# Altium PCB Sensor_LoRa_Flower_Watchdog.PCBDOC (part 1 of 2)
Units mil, origin at the board's own origin, x right, y up, seen from the top; angles counter-clockwise.
Board outline 1299.21 x 7913.39 mil, 2 copper layers (Top, Bot), stack 63.824 mil thick; 64 components, 53 nets, 204 pads, 152 vias.
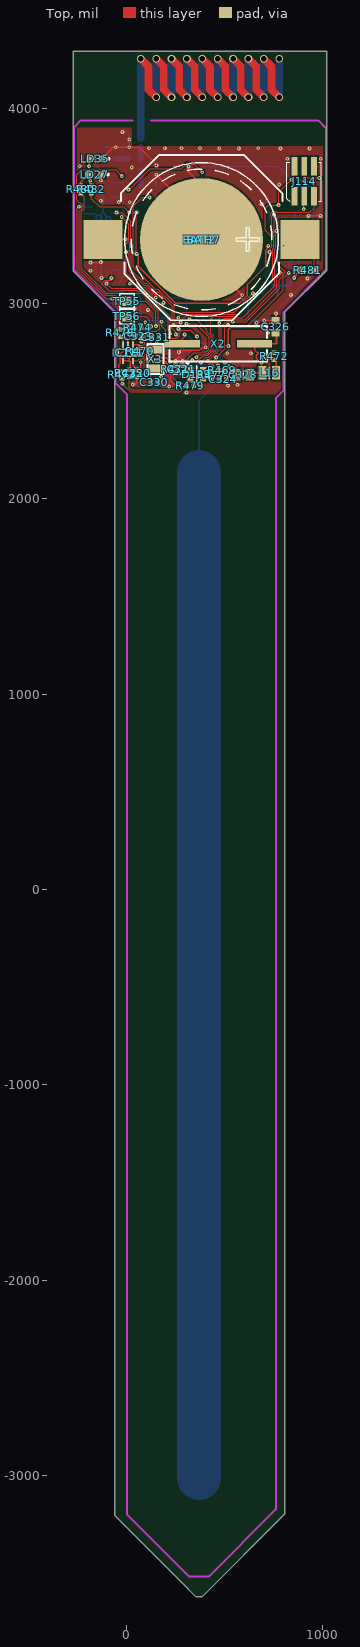
[diagram p0: Top view]
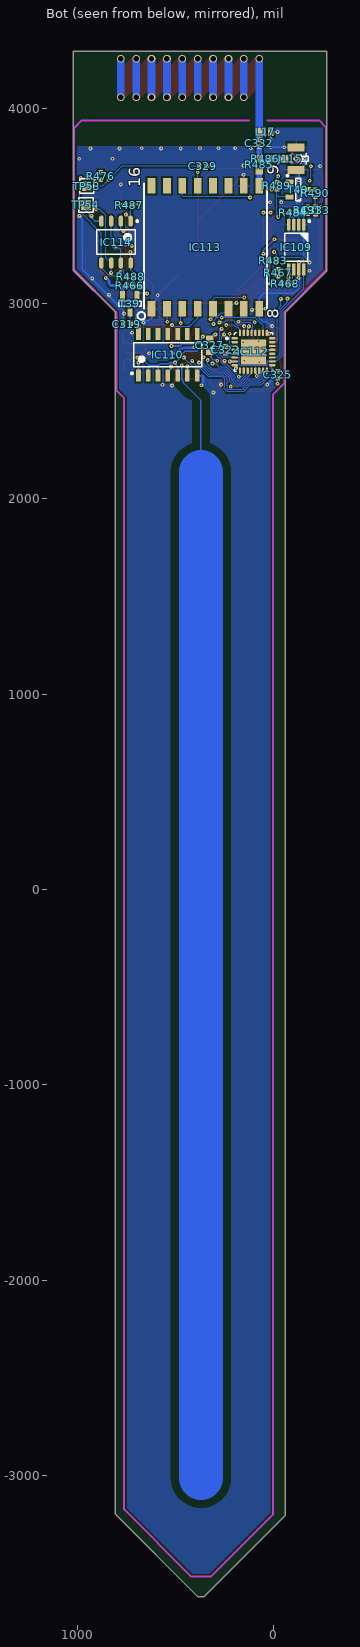
[diagram p1: Bot view, seen from below]
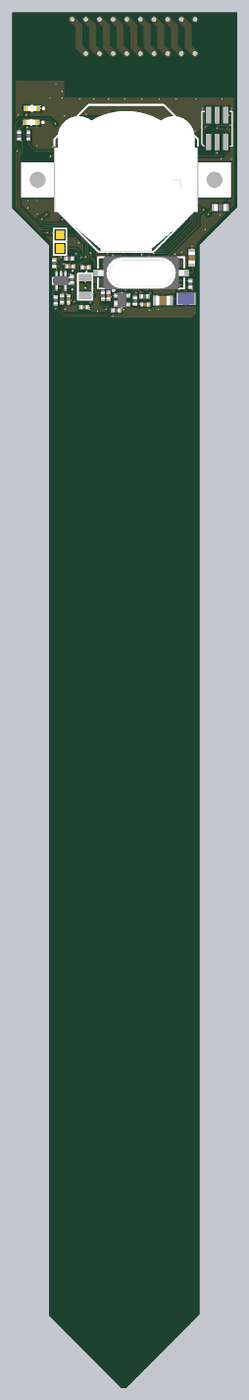
[diagram p2: 3D render of the assembled board from above, using the file's embedded part models]
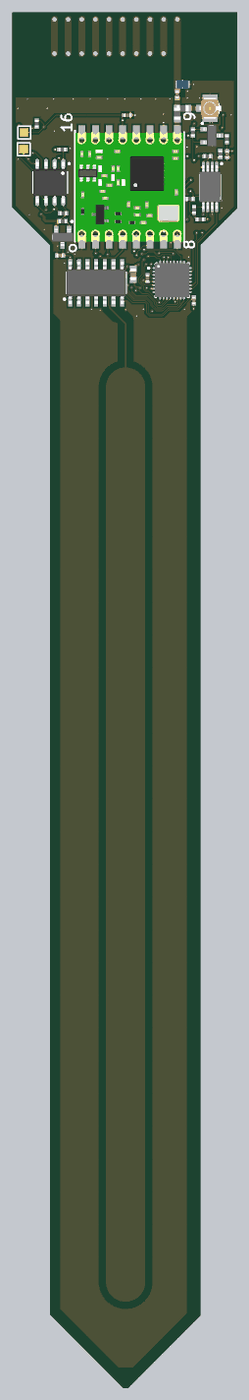
[diagram p3: 3D render of the assembled board from below, using the file's embedded part models]

## Layer stack, top to bottom
TopSolder: solder mask 0.4, Solder Resist, Dk 3.5
Top: signal copper 1.4
Dielectric1: core 61.0236, FR-4, Dk 4.8
Bot: signal copper 1.4
BottomSolder: solder mask 0.4, Solder Resist, Dk 3.5

## Board outline
-62.15,-3172.39 -62.15,2952.76 -275.59,3166.2 -275.59,4291.34 1023.62,4291.34 1023.62,3169.6 806.77,2952.76 806.77,-3172.39 806.77,-3199.13 383.86,-3622.05 354.33,-3622.05 275.59,-3543.31 -62.15,-3205.57

## Design rules (kind name [scope] priority, off if disabled: settings)
Clearance Clearance_1 [InNet('GND') vs InNet('PROBE')] p1: gap=42.13 ignorepadtopadclearanceinfootprint=FALSE
Clearance Clearance_DIFF [(InDifferentialPairClass('All Differential Pairs'))] p2: gap=5 ignorepadtopadclearanceinfootprint=FALSE except(0: Arc-Hole Track-Hole SMDPad-Hole THPad-Hole Via-Hole Fill-Hole Poly-Hole Region-Hole Text-Hole; 10: Arc-Poly Track-Poly SMDPad-Poly THPad-Poly Via-Poly Fill-Poly Poly-Poly Poly-Region Poly-Text)
Clearance [All] p3: gap=5 ignorepadtopadclearanceinfootprint=FALSE except(0: Arc-Hole Track-Hole SMDPad-Hole THPad-Hole Via-Hole Fill-Hole Poly-Hole Region-Hole Text-Hole; 10: Arc-Poly Track-Poly SMDPad-Poly Via-Poly; 15: THPad-Poly Fill-Poly Poly-Poly)
ComponentClearance [All] p1: gap=5 collisioncheckmode=3 verticalgap=10 showdistances=FALSE
DiffPairsRouting [All] p1: maxlimit=10 minlimit=5 mostfreqgap=5 toplayer_minwidth=5 toplayer_maxwidth=15 toplayer_prefwidth=10 bottomlayer_minwidth=5 bottomlayer_maxwidth=15 bottomlayer_prefwidth=10 maxuncoupledlength=500
FabricationTestPointUsage TestPointUsage [All] p1: valid=0 allowmultiple=FALSE
FabricationTestpoint Testpoint [All] p1: side=3 testpointundercomponent=TRUE minsize=40 maxsize=100 preferedsize=60 minholesize=20 maxholesize=40 preferedholesize=32 testpointgrid=1 allowsidetop=TRUE allowsidebottom=TRUE usegrid=TRUE gridtolerance=0.01
HoleSize [All] p1: absolutevalues=TRUE maxlimit=150 minlimit=1 maxpercent=80.000 minpercent=20.000
HoleToHoleClearance [All] p1: gap=1 allowstackedmicrovias=TRUE
MinimumSolderMaskSliver [All] p1: minsoldermaskwidth=0
PlaneClearance [All] p1: clearance=10
PlaneConnect [All] p1: planeconnectstyle=Direct reliefexpansion=20 reliefentries=4 reliefconductorwidth=10 reliefairgap=10
PolygonConnect PolygonConnect_pad [(InPadClass('All Pads'))] p1: connectstyle=Relief reliefconductorwidth=10 reliefentries=4 polygonreliefangle="90 Angle" airgapwidth=10
PolygonConnect [All] p2: connectstyle=Direct reliefconductorwidth=10 reliefentries=4 polygonreliefangle="45 Angle" airgapwidth=10
RoomDefinition Sensor_LoRa_Flower_Watchdog [InComponentClass('Sensor_LoRa_Flower_Watchdog')] p1 off: confinementstyle=ConfineIn formatcopy=TRUE lockcomponents=FALSE outline 5.91,133.86 415.35,133.86 415.35,1511.81 5.91,1511.81
RoutingVias [All] p1: holewidth=7.87 width=19.68 viastyle="Through Hole" minholewidth=7.87 minwidth=19.68 maxholewidth=28 maxwidth=50
SilkToSilkClearance [All] p1: silktosilkclearance=0
SilkToSolderMaskClearance SilkscreenOverComponentPads [IsPad] p1: minsilkscreentomaskgap=0 clearancetoexposedcopper=TRUE
SolderMaskExpansion [All] p1: expansion=2
Width [All] p1: maxlimit=236.22 minlimit=5 preferedwidth=5
19 further rules are at their usual default settings.

## Components (designator, comment, footprint, x,y, rotation, side; value= is the part's Value field where it differs from the comment)
BAT2 "3V" BAT_VARTA_CR2032 381.89,3326.77 r0 top locked
BATH7 "3002" "KEYSTONE 3002" 381.89,3326.77 r0 top locked
C319 "100nF" CAPC1005X55N 748.03,2893.7 r180 bottom
C320 "100nF" CAPC1005X55N 50.2,2641.73 r270 top
C321 "1nF" CAPC1005X55N 281.5,2662.4 r270 top
C322 "100nF" CAPC1005X55N 242.89,2761.81 r90 bottom
C323 "1nF" CAPC1005X55N 59.06,2831.34 r180 top
C324 "22pF" CAPC1005X55N 492.13,2611.22 r180 top
C325 "1nF" CAPC1005X55N -24.61,2634.99 r270 bottom
C326 "39pF" CAPC1608X87N 760.83,2880.91 r270 top locked
C327 "39pF" CAPC1608X87N 324.8,2785.43 r90 bottom
C328 "82pF" CAPC2012X90N 594.49,2634.84 r0 top
C329 "100nF" CAPC1005X55N 359.33,3700.79 r0 bottom
C330 "22pF" CAPC1005X55N 140.05,2595.71 r180 top
C331 "22pF" CAPC1005X55N 147.64,2825.98 r180 top
C332 "1pF" CAPC1005X55N 70.87,3818.9 r90 bottom
C333 "1nF" CAPC1005X55N -217.52,3475.39 r90 bottom
D139 "BAS40-07W" INFINEON-PG-SOT343-4 357.28,2636.81 r0 top
IC109 "M24256-BRDW6" SOP65P640X120-8N -118.11,3287.4 r270 bottom
IC110 "SN74LVC04AD" SOIC127P600X175-14N 538.78,2736.22 r90 bottom locked
IC111 "MCP6L01T-E/LT" SC70 31.5,2788.39 r180 top locked
IC112 "ATMEGA328PB-MU" QFN50P500X500X100-33N-S325 100.39,2751.97 r180 bottom locked
IC113 "RFM95W-868S2" RFM95W 346.46,3287.4 r90 bottom locked
IC114 "W25X40CLSNIG" SOIC127P600X135-8N 803.74,3313.98 r270 bottom locked
J114 "ZL322-2X3P or PLHTD6S-TR-CV" ZL322-2X3P 907.68,3624.02 r0 top locked
J115 "U.FL" HIROSE_U.FL-R-SMT-1(10) -118.11,3740.16 r270 bottom
L16 "47nH" IND_COILCRAFT_0805CS 728.35,2644.09 r0 top locked
L17 "12nH" IND_COILCRAFT_0603HP 39.37,3877.95 r180 bottom
LD27 "Green" LED_KINGBRIGHT_KPH-1608CGCK -165.35,3659.59 r180 top
LD35 "Green" LED_KINGBRIGHT_KPH-1608CGCK -161.42,3740.16 r180 top
R466 "100k" RESC1005X40N 732.68,3090.55 r0 bottom
R467 "10k" RESC1005X40N -26.57,3156.69 r90 bottom
R468 "10k" RESC1005X40N -62.2,3101.38 r180 bottom
R469 "120" RESC1005X40N 488.39,2657.48 r180 top
R470 "47k" RESC1005X40N 68.9,2754.74 r270 top
R471 "10k" RESC1005X40N 248.03,2662.4 r270 top
R472 "1M" RESC1005X40N 752.95,2729.33 r90 top
R473 "10k" RESC1005X40N -24.6,2634.99 r270 top
R474 "10k" RESC1005X40N 54.13,2875.98 r180 top
R475 "10k" RESC1005X40N 11.81,2642.72 r90 top
R476 "10k" RESC1005X40N 881.89,3651.57 r270 bottom
R477 "120" RESC1005X40N 433.07,2631.89 r270 top
R478 "47k" RESC1005X40N -33.92,2848.43 r270 top
R479 "10k" RESC1005X40N 324.56,2577.6 r180 top
R480 "10k" RESC1005X40N -236.22,3582.87 r90 top
R481 "0" RESC1608X55N 926.18,3169.29 r0 top
R482 "10k" RESC1005X40N -182.09,3582.87 r90 top
R483 "10k" RESC1005X40N -1.57,3218.5 r0 bottom
R484 "100k" RESC1005X40N -103.35,3464.57 r0 bottom
R485 "Undefined" RESC1608X55N 70.87,3708.66 r90 bottom
R486 "0" RESC1608X55N 39.37,3740.16 r0 bottom
R487 "10k" RESC1005X40N 735.04,3502.95 r0 bottom
R488 "10k" RESC1005X40N 729.65,3136.03 r0 bottom
R489 "100k" RESC1005X40N -19.68,3601.38 r270 bottom
R490 "560k" RESC1005X40N -216.54,3562.99 r270 bottom
R491 "100k" RESC1005X40N -177.17,3477.36 r90 bottom
T39 "BSS84LT1G" SOT95P240X110-3N 732.68,2998.03 r270 bottom
T40 "BSS84LT1G" SOT95P240X110-3N -128.94,3582.68 r180 bottom
TP53 "Test Point" TPS127 953.74,3600.39 r180 bottom
TP54 "Test Point" TPS127 957.68,3503.94 r180 bottom
TP55 "Test Point" TPS127 0,3011.81 r0 top
TP56 "Test Point" TPS127 0,2933.07 r0 top
X2 "QSDG27M000-TXC or MCRSD27000F183000RR" HC-49SM 468.54,2793.31 r0 top locked
X3 "FC-135 32.768KHZ ±20PPM,12.5PF" XTAL_FC135 145.67,2716 r90 top

## Footprints (in the part's own frame and the unit in brackets; to place one, negate y for a bottom-side part, rotate by r counter-clockwise, add the part's x,y. Pads: shape width x height; smd on the part's side, far side on the other; paste and mask are expansions set on the pad)
BAT_VARTA_CR2032 [mil] "CR2032, 20mm Diameter x 32mm  Height Lithium Coin Cells"
  silkscreen extent -394,-394 394,394, body extent -394,-394 394,394, height 126
CAPC1005X55N [mm] "Chip Capacitor, Body 1.0x0.55mm, IPC Medium Density"
  rect 0.62x0.62 smd: 1(-0.45,0) 2(0.45,0)
  body extent -0.52,-0.27 0.53,0.28, height 0.55
CAPC1608X87N [mm] "Chip Capacitor, Body 1.6x0.8mm IPC Medium Density"
  rect 0.95x1 smd: 1(-0.8,0) 2(0.8,0)
  body extent -0.87,-0.47 0.88,0.48, height 0.87
CAPC2012X90N [mm] "Chip Capacitor, Body 2.0x1.25mm, IPC Medium Density"
  rect 1.1x1.45 smd: 1(-0.9,0) 2(0.9,0)
  silkscreen extent 0,-0.58 0,0.58, body extent -1.05,-0.67 1.05,0.68, height 0.9
HC-49SM [mil]
  rect 180x39.37 smd: 1(185,0) 2(-185,0)
  silkscreen extent -250,-90 249,90, body extent -250,-94 250,94, height 63
HIROSE_U.FL-R-SMT-1(10) [mm] "Up to 6GHz Ultra Small Surface Mount Male Coaxial Connectors U.FL Series"
  rect 1x1.05 smd: 1(0,-1.525)
  rect 1.05x2.2 smd: 2(-1.475,0) 2(1.475,0)
  Top keep-out lines w0.1: 0.6,0 ccw(c0,0) -0.6,0 -0.6,-0.65 0.6,-0.65 0.6,0
  silkscreen extent -0.7,-0.69 0.7,1.55, body extent -1.5,-1.55 1.5,1.55, height 1.25
IND_COILCRAFT_0603HP [mm] "Chip Inductor, Body Width 1.09mm Body Lenght 1.75mm Height 0.94mm"
  rect 0.69x1.02 smd: 1(-0.7,0) 2(0.7,0)
  silkscreen extent 0,-0.55 0,0.55, body extent -0.87,-0.54 0.88,0.55, height 0.93
IND_COILCRAFT_0805CS [mm] "SMD Inductor  Body Width 1.73mm Body Lenght 2.29mm Height 1.52mm, 0805CS Series"
  rect 1.02x1.78 smd: 1(-0.89,0) 2(0.89,0)
  silkscreen extent 0,-0.75 0,0.75, body extent -1.14,-0.86 1.14,0.86, height 1.52
INFINEON-PG-SOT343-4 [mm] "INFINEON PG-SOT343-4, SOT343, 1.30mm Pitch; 4 Pin,1.25mm W X 2.00mm L X 1.10mm H body, IPC Medium Density"
  rect 0.8x0.6 smd: 1(-0.8,0.65) 3(0.8,-0.65) 4(0.8,0.65)
  rect 0.8x0.9 smd: 2(-0.8,-0.5)
  silkscreen extent -1.32,-1.1 0,1.52, body extent -1.05,-1.1 1.05,1.1, height 1.1
"KEYSTONE 3002" [mm] "KEYSTONE 3002 CR2032 BATTERY HOLDER"
  rect 5.1x5.1 smd: 1a(12.8,0) 1b(-12.8,0)
  round 16 smd paste-15: 2(0,0)
  silkscreen extent -10.5,-10.5 10.5,11, body extent -15.38,-10.51 15.38,9.36, height 3.95
LED_KINGBRIGHT_KPH-1608CGCK [mm] "SMT Green LED, Case 0603, Body L 1.6 x W 0.8mm H 0.65mm"
  rect 0.8x0.8 smd: 1(-0.825,0) 2(0.825,0)
  silkscreen extent -1.83,-0.4 0.08,0.4, body extent -0.8,-0.4 0.8,0.4, height 0.65
QFN50P500X500X100-33N-S325 [mm] "QFN, (MO-220-VHHD-2) 0.50mm pitch,square; 8 pin X 8 pin, 5mm X 5mm X 1.00mm H body (w/thermal tab 3.25 X 3.25mm),  IPC Medium Density"
  oval 0.85x0.3 smd: 1(-2.45,1.75) 2(-2.45,1.25) 3(-2.45,0.75) 4(-2.45,0.25) 5(-2.45,-0.25) 6(-2.45,-0.75) 7(-2.45,-1.25) 8(-2.45,-1.75) 17(2.45,-1.75) 18(2.45,-1.25) 19(2.45,-0.75) 20(2.45,-0.25) 21(2.45,0.25) 22(2.45,0.75) 23(2.45,1.25) 24(2.45,1.75)
  oval 0.3x0.85 smd: 9(-1.75,-2.45) 10(-1.25,-2.45) 11(-0.75,-2.45) 12(-0.25,-2.45) 13(0.25,-2.45) 14(0.75,-2.45) 15(1.25,-2.45) 16(1.75,-2.45) 25(1.75,2.45) 26(1.25,2.45) 27(0.75,2.45) 28(0.25,2.45) 29(-0.25,2.45) 30(-0.75,2.45) 31(-1.25,2.45) 32(-1.75,2.45)
  rect 3.25x3.25 smd: 33(0,0)
  silkscreen extent -3.58,-2.5 2.5,2.5, body extent -2.5,-2.5 2.5,2.5, height 1
RESC1005X40N [mm] "Chip Resistor, EIA 0402, Metric 1005, Body 1.0x0.5mm, IPC Medium Density"
  rect 0.58x0.62 smd: 1(-0.47,0) 2(0.47,0)
  body extent -0.52,-0.27 0.53,0.28, height 0.4
RESC1608X55N [mm] "Chip Resistor, EIA 0603, Metric 1608, Body 1.6x0.8mm, IPC Medium Density"
  rect 0.9x1 smd: 1(-0.8,0) 2(0.8,0)
  body extent -0.87,-0.47 0.88,0.48, height 0.55
RFM95W [mm] "RFM95W"
  rect 2x1 smd: 1(-8,7) 2(-8,5) 3(-8,3) 4(-8,1) 5(-8,-1) 6(-8,-3) 7(-8,-5) 8(-8,-7) 9(8,-7) 10(8,-5) 11(8,-3) 12(8,-1) 13(8,1) 14(8,3) 15(8,5) 16(8,7)
  silkscreen extent -9.42,-8 8.25,8.83, body extent -8,-7.95 8,7.95, height 2.29
SC70 [mm]
  rect 0.3x0.8 smd: 1(0,0) 2(0.65,0) 3(1.3,0) 4(1.3,2.1) 5(0,2.1)
  silkscreen extent -0.5,0.6 1.9,1.5, body extent -0.46,-0.18 1.74,2.22, height 1.1
SOIC127P600X135-8N [mm] "SOIC, 8-Leads, Body 4.90x3.90mm, Pitch 1.27mm, IPC Medium Density"
  oval 1.45x0.6 smd: 1(-2.725,1.905) 2(-2.725,0.635) 3(-2.725,-0.635) 4(-2.725,-1.905) 5(2.725,-1.905) 6(2.725,-0.635) 7(2.725,0.635) 8(2.725,1.905)
  silkscreen extent -2.85,-2.5 1.6,2.88, body extent -3,-2.5 3,2.5, height 1.35
SOIC127P600X175-14N [mm] "SOIC 14, Pitch 1.27mm - Body 4x8.75mm, IPC Medium Density"
  rect 1.55x0.6 smd: 1(-2.7,3.81) 2(-2.7,2.54) 3(-2.7,1.27) 4(-2.7,0) 5(-2.7,-1.27) 6(-2.7,-2.54) 7(-2.7,-3.81) 8(2.7,-3.81) 9(2.7,-2.54) 10(2.7,-1.27) 11(2.7,0) 12(2.7,1.27) 13(2.7,2.54) 14(2.7,3.81)
  silkscreen extent -2.52,-4.4 1.55,4.79, body extent -3.1,-4.37 3.1,4.38, height 1.75
SOP65P640X120-8N [mm] "SOP, 0.65mm pitch; 8 pin, 4.40mm W X 3.00mm L X 1.20mm H body, IPC Medium Density"
  rect 1.5x0.45 smd: 1(-2.9,0.975) 2(-2.9,0.325) 3(-2.9,-0.325) 4(-2.9,-0.975) 5(2.9,-0.975) 6(2.9,-0.325) 7(2.9,0.325) 8(2.9,0.975)
  silkscreen extent -3.52,-1.5 1.83,1.82, body extent -3.2,-1.55 3.2,1.55, height 1.2
SOT95P240X110-3N [mm] "SOT23 3-Leads, Pitch 0.95mm, Body 1.3x2.9mm, IPC Medium Density"
  rect 1.05x0.65 smd: 1(-1.15,0.95) 2(-1.15,-0.95) 3(1.15,0)
  silkscreen extent -2.42,-1.45 0.3,1.48, body extent -1.25,-1.5 1.25,1.5, height 1.1
TPS127 [mil] "1.27 x  1.27mm SMD Test Point Area"
  rect 50x50 smd paste-50: 1(0,0)
  silkscreen extent -37,-37 37,37
XTAL_FC135 [mm]
  rect 1x1.8 smd: 1(-1.25,0) 2(1.2,0)
  silkscreen extent -1.95,-1.05 1.9,1.05, body extent -1.63,-0.77 1.63,0.77, height 0.8
ZL322-2X3P [mm] "SMT 1.27 mm dual goldpin"
  rect 0.76x2.4 smd: 1(-1.27,-1.95) 2(-1.27,1.95) 3(0,-1.95) 4(0,1.95) 5(1.27,-1.95) 6(1.27,1.95)
  silkscreen extent -2.25,-2.58 2.2,2.5, body extent -2.05,-2.15 2.03,2.15, height 4.5

## Part data
BAT2: library part BAT_VARTA_CR2032, "Battery for use only with Socket Holder", Manufacturer=VARTA, Manufacturer Part Number=6032101501, Power=230mAh, Author="CERN DEM JLC", ComponentHeight=3.2mm, Component Type=Standard, CreateDate=20/10/2009, Family=Battery, HelpURL=\\cern.ch\dfs\Applications\Altium\Datasheets\BAT_VARTA_CR2032.pdf, LatestRevisionDate=20/10/2009, Mounted=Yes, PackageDescription="CR2032, 20mm Diameter x 3.2mm  Height Lithium Coin Cells", Part Description="20x3.2mm Lithium Coin Cells Type CR2032", Part Number=BAT_VARTA_CR2032, Pin Count=0, PressFit=No, Sense=No, SMD=No, Socket=Yes
BATH7: "Battery Holder Keystone 3002", Manufacturer=KEYSTONE, Part Number=BATH_KEYSTONE_3000, Author=GK, ComponentHeight=3.17mm, Component Type=Standard, CreateDate=17/04/2012, Family=Battery, HelpURL=\\cern.ch\dfs\Applications\Altium\Datasheets\BATH_KEYSTONE_3000.pdf, LatestRevisionDate=07/06/2017, Manufacturer Part Number=3002, Mounted=Yes, PackageDescription="KEYSTONE 3002 CR2032 BATTERY HOLDER", Part Description="KEYSTONE 3002 CR2032 BATTERY HOLDER", Pin Count=3, PressFit=No, Sense=No, SMD=Yes, Socket=No
C319 C320 C322 C329: library part CC0402_100NF_16V_10%_X5R, "Non-polarised capacitor", Case=0402, Manufacturer=GENERIC, Manufacturer1 ComponentHeight=0.55mm, Manufacturer1 Example=MURATA, Manufacturer1 Part Number=GRM155R61C104KA88D, Tolerance=±10%, Voltage=16V, Author="CERN DEM JLC", Component Type=Standard, CreateDate=10.12.2013, HelpURL=\\cern.ch\dfs\Applications\Altium\Datasheets\CC0402_X5R_MURATA_GRM.pdf, LatestRevisionDate=10.12.2013, Manufacturer Part Number=CC0402_100NF_16V_10%_X5R, Mounted=Yes, Part Description="SMD Multilayer Chip Ceramic Capacitor", Part Number=CC0402_100NF_16V_10%_X5R, Pin Count=2, Sense=No, SMD=Yes, Socket=No, Status=None, TC=X5R
C321 C323 C325 C333: library part CC0402_1NF_50V_10%_X7R, "Non-polarised capacitor", Case=0402, Manufacturer=GENERIC, Manufacturer1 ComponentHeight=0.55mm, Manufacturer1 Example=PHYCOMP, Manufacturer1 Part Number=223858715623, Tolerance=±10%, Voltage=50V, Author="CERN DEM JLC", Component Type=Standard, CreateDate=03/12/2007, HelpURL=\\cern.ch\dfs\Applications\Altium\Datasheets\CC0402_X7R_PHYCOMP.pdf, LatestRevisionDate=03/12/2007, Manufacturer Part Number=CC0402_1NF_50V_10%_X7R, Mounted=Yes, Part Description="SMD Multilayer Chip Ceramic Capacitor", Part Number=CC0402_1NF_50V_10%_X7R, Pin Count=2, Sense=No, SMD=Yes, Socket=No, Status="Not Recommended", TC=X7R
C324 C330 C331: library part CC0402_22PF_50V_5%_C0G, "Non-polarised capacitor", Case=0402, Manufacturer=GENERIC, Manufacturer1 ComponentHeight=0.55mm, Manufacturer1 Example=KEMET, Manufacturer1 Part Number=C0402C220J5GACTU, Tolerance=±5%, Voltage=50V, Author="CERN DEM JLC", Component Type=Standard, CreateDate=03/12/2007, HelpURL="\\cern.ch\dfs\Applications\Altium\Datasheets\CC0805_C0G_KEMET_(Commercial Grade).pdf", LatestRevisionDate=03/12/2007, Manufacturer Part Number=CC0402_22PF_50V_5%_C0G, Mounted=Yes, Part Description="SMD Multilayer Chip Ceramic Capacitor", Part Number=CC0402_22PF_50V_5%_C0G, Pin Count=2, Sense=No, SMD=Yes, Socket=No, Status=Preferred, TC=C0G/NP0
C326 C327: library part CC0603_39PF_50V_5%_NP0, "Non-polarised capacitor", Case=0603, Manufacturer=GENERIC, Manufacturer1 ComponentHeight=0.87mm, Manufacturer1 Example=PHYCOMP, Manufacturer1 Part Number=223886715399, Tolerance=±5%, Voltage=50V, Author="CERN DEM JLC", Component Type=Standard, CreateDate=03/12/2007, HelpURL=\\cern.ch\dfs\Applications\Altium\Datasheets\CC0603_NP0_PHYCOMP.pdf, LatestRevisionDate=03/12/2007, Manufacturer Part Number=CC0603_39PF_50V_5%_NP0, Mounted=Yes, Part Description="SMD Multilayer Chip Ceramic Capacitor", Part Number=CC0603_39PF_50V_5%_NP0, Pin Count=2, Sense=No, SMD=Yes, Socket=No, Status=Preferred, TC=C0G/NP0
C328: library part CC0805_82PF_100V_1%_NP0_AVX_08051A820FAT2A, "Non-polarised capacitor", Case=0805, Manufacturer=AVX, Manufacturer Part Number=08051A820FAT2A, Tolerance=±1%, Voltage=100V, Author="CERN DEM WB", ComponentHeight=0.9mm, Component Type=Standard, CreateDate=26/07/2016, HelpURL=\\cern.ch\dfs\Applications\Altium\Datasheets\CC0805_C0G_AVX.pdf, LatestRevisionDate=26/07/2016, Mounted=Yes, Part Description="SMD Multilayer Chip Ceramic Capacitor", Part Number=CC0805_82PF_100V_1%_NP0_AVX_08051A820FAT2A, Pin Count=2, Sense=No, SMD=Yes, Socket=No, Status="Not Recommended", TC=NP0
C332: library part CC0402_1PF_50V_0.25PF_C0G, "Non-polarised capacitor", Case=0402, Manufacturer=GENERIC, Manufacturer1 ComponentHeight=0.55mm, Manufacturer1 Example=KEMET, Manufacturer1 Part Number=C0402C109C5GACTU, Tolerance=±0.25pF, Voltage=50V, Author="CERN DEM JLC", Component Type=Standard, CreateDate=03/12/2007, HelpURL="\\cern.ch\dfs\Applications\Altium\Datasheets\CC0805_C0G_KEMET_(Commercial Grade).pdf", LatestRevisionDate=22/04/2015, Manufacturer Part Number=CC0402_1PF_50V_0.25PF_C0G, Mounted=Yes, Part Description="SMD Multilayer Chip Ceramic Capacitor", Part Number=CC0402_1PF_50V_0.25PF_C0G, Pin Count=2, Sense=No, SMD=Yes, Socket=No, Status=Preferred, TC=C0G/NP0
D139: "Anti-Parallel Pair Schottky Diode", Case=SOT343, Manufacturer=INFINEON, Part Number=BAT15099E6327HTSA1, Power=120mA, Voltage=4V, Author=GK, Bonding=No, ComponentHeight=1.1mm, Component Type=Standard, CreateDate=28/03/2018, Device=BAS40-07W, HelpURL=\\cern.ch\dfs\Applications\Altium\Datasheets\BAT15099E6327HTSA1.pdf, LatestRevisionDate=28/03/2018, Manufacturer Part Number=BAS40-07W, Mounted=Yes, PackageDescription="INFINEON PG-SOT343-4, SOT343, 1.30mm Pitch; 4 Pin,1.25mm W X 2.00mm L X 1.10mm H body, IPC Medium Density", Part Description="Anti-Parallel Pair Schottky Diode", Pin Count=4, PressFit=No, Sense=No, SMD=Yes, Socket=No
IC109: "256-Kbit Serial I²C Bus EEPROM", Case=TSSOP8, Manufacturer="ST MICROELECTRONICS", Part Number=M24256-BRDW6P, Author="CERN DEM MR", Bonding=No, ComponentHeight=1.2mm, Component Type=Standard, CreateDate=17.03.2016, Device=M24256-BRDW6, HelpURL=\\cern.ch\dfs\Applications\Altium\Datasheets\M24256-BRDW6P.pdf, LatestRevisionDate=17.03.2016, Manufacturer Part Number=M24256-BRDW6, Mounted=Yes, PackageDescription="SOP, 0.65mm pitch; 8 pin, 4.40mm W X 3.00mm L X 1.20mm H body, IPC Medium Density", Part Description="256-Kbit Serial I²C Bus EEPROM", Pin Count=8, PressFit=No, Sense=No, SMD=Yes, Socket=No
IC110: "Hex Inverter", Case=SOIC14, Manufacturer="TEXAS INSTRUMENTS", Author="CERN DEM JLC", Bonding=No, ComponentHeight=1.75mm, Component Type=Standard, CreateDate=21/06/2011, Device=SN74LVC04AD, HelpURL=\\cern.ch\dfs\Applications\Altium\Datasheets\SN74LVC04AD.pdf, LatestRevisionDate=21/06/2011, Manufacturer Part Number=SN74LVC04AD, Mounted=Yes, PackageDescription="SOIC 14, Pitch 1.27mm - Body 4x8.75mm, IPC Medium Density", Part Description="Hex Inverters", Part Number=SN74LVC04AD, Pin Count=12, PressFit=No, Sense=No, SMD=Yes, Socket=No
IC111: library part OA_MCP6001_SC-70, "1 MHz, Low-Power Op Amp"
IC112: "8-bit AVR 20MHz Microcontroller With 32K Bytes In-System  Programmable  Flash", Case=QFN32, Manufacturer=ATMEL, Author=GK, Bonding=No, ComponentHeight=1mm, Component Type=Standard, CreateDate=2011-02-08, Device=ATMEGA328PB-MU, HelpURL=\\cern.ch\dfs\Applications\Altium\Datasheets\ATMEGA328P-MU.pdf, LatestRevisionDate=2014-07-02, Manufacturer Part Number=ATMEGA328PB-MU, Mounted=Yes, PackageDescription="QFN, (MO-220-VHHD-2) 0.50mm pitch,square; 8 pin X 8 pin, 5mm X 5mm X 1.00mm H body (w/thermal tab 3.25 X 3.25mm),  IPC Medium Density", Part Description="8-bit AVR Microcontroller, 32KB Flash, 1KB EEPROM, 2KB SRAM, 32-pin MLF, Industrial Grade (-40°C to 85°C)", Part Number=ATMEGA328PB-MU, Pin Count=33, PressFit=No, Sense=No, SMD=Yes, Socket=No
IC113: "Low Power LoRa Transceiver Module", Manufacturer="HOPE MICROELECTRONICS", Author=GK, Bonding=No, ComponentHeight=1.52mm, Component Type=Standard, CreateDate=11.08.2016, Device=RFM95W-868S2, HelpURL=\\cern.ch\dfs\Applications\Altium\Datasheets\ERA-4XSM+.pdf, LatestRevisionDate=11.08.2016, Manufacturer Part Number=RFM95W-868S2, Mounted=Yes, PackageDescription="castellated module", Part Description="DC-3GHz Monolithic Amplifier", Part Number=RFM95W-868S2, Pin Count=16, PressFit=No, Sense=No, SMD=Yes, Socket=No
IC114: "4M-bit Serial Flash Memory with uniform 4KB sectors and Dual SPI and QPI", Case=SOIC8, Manufacturer=WINBOND, Author=GK, Bonding=No, ComponentHeight=2.16mm, Component Type=Standard, CreateDate=26/01/2018, Device=W25X40CLSNIG, HelpURL=\\cern.ch\dfs\Applications\Altium\Datasheets\W25Q128FVSIG.pdf, LatestRevisionDate=26/01/2018, Manufacturer Part Number=W25X40CLSNIG, Mounted=Yes, PackageDescription="SOIC, 8-Leads, Body 4.90x3.90mm, Pitch 1.27mm, IPC Medium Density", Part Description="4M-bit Serial Flash Memory with uniform 4KB sectors and Dual SPI", Part Number=W25X40CLSNIG, Pin Count=8, PressFit=No, Sense=No, SMD=Yes, Socket=No
J114: library part "CON_2x3 1.27 SMT Male", "1.27 mm dual row goldpin (Maritex)"
J115: library part HIROSE_U.FL-R-SMT-1(10), Manufacturer="HIROSE (HRS)", Manufacturer Part Number=U.FL-R-SMT-1(10), Author="CERN DEM JLC", ComponentHeight=1.25mm, Component Type=Standard, CreateDate=24/03/2010, Family=U.FL, HelpURL=\\cern.ch\dfs\Applications\Altium\Datasheets\HIROSE_U.FL-R-SMT-1(10).pdf, LatestRevisionDate=24/03/2010, Mounted=Yes, Part Description="Up to 6GHz Ultra Small Surface Mount Male Coaxial Connectors U.FL Series", Part Number=HIROSE_U.FL-R-SMT-1(10), Pin Count=2, PressFit=No, Sense=No, SMD=Yes, Socket=No, Status=None
L16: library part IND_47NH_2%_COILCRAFT_0805CS, "Inductor With Core", Case=0805, Manufacturer=COILCRAFT, Manufacturer Part Number=0805CS-470XGLC, Power=500mA, Resistance=0.31R, Tolerance=±2%, Author="CERN DEM JLC", ComponentHeight=1.52mm, Component Type=Standard, CreateDate=19/08/2013, HelpURL=\\cern.ch\dfs\Applications\Altium\Datasheets\IND_COILCRAFT_0805CS.pdf, LatestRevisionDate=20/08/2013, Mounted=Yes, Part Description="SMT Chip Inductor", Part Number=IND_47NH_2%_COILCRAFT_0805CS, Pin Count=2, Sense=No, SMD=Yes, Socket=No, Status=None
L17: "Inductor", Case=0603, Manufacturer=Murata, Manufacturer Part Number=LQW18AN12NG00D, Part Number=IND0603_12NH_2%_LQW18AN12NG00D, Power=0.6A, Resistance=0.13R, Tolerance=±2%, Author=GK, ComponentHeight=0.94mm, Component Type=Standard, CreateDate=09/02/2017, HelpURL=\\cern.ch\dfs\Applications\Altium\Datasheets\IND0603_COILCRAFT_0603HP.pdf, LatestRevisionDate=09/02/2017, Mounted=Yes, Part Description="Ceramic Chip Inductor", Pin Count=2, Sense=No, SMD=Yes, Socket=No, Status=None
LD27 LD35: library part LED_KINGBRIGHT_KPH-1608CGCK, "LED Green 1C 2A", Manufacturer=KINGBRIGHT, Manufacturer Part Number=KPH-1608CGCK, Author="CERN DEM JLC", Bonding=No, Color=Green, ComponentHeight=0.65mm, Component Type=Standard, CreateDate=03.07.2017, HelpURL=\\cern.ch\dfs\Applications\Altium\Datasheets\LED_KINGBRIGHT_KPH-1608CGCK.pdf, LatestRevisionDate=03.07.2017, Mounted=Yes, PackageDescription="SMT Green LED, Case 0603, Body L 1.6 x W 0.8mm H 0.65mm", Part Description="SMD Green LED, Case 1.6mmX0.8mm(0603), 0.65mm Thickness", Part Number=LED_KINGBRIGHT_KPH-1608CGCK, Pin Count=2, PressFit=No, Sense=No, SMD=Yes, Socket=No
R466 R484 R489 R491: library part R0402_100K_1%_0.0625W_100PPM, "Resistor - 1%", Case=0402, Manufacturer=GENERIC, Manufacturer1 ComponentHeight=0.4mm, Manufacturer1 Example="YAGEO PHYCOMP", Manufacturer1 Part Number=232270671004L, Power=0.0625W, Tolerance=±1%, Author="CERN DEM JLC", Component Type=Standard, CreateDate=03/12/2007, HelpURL=\\cern.ch\dfs\Applications\Altium\Datasheets\R0402_Phycomp_RC0402.pdf, LatestRevisionDate=17/10/2012, Manufacturer Part Number=R0402_100K_1%_0.0625W_100PPM, Mounted=Yes, Part Description="General Purpose Thick Film Chip Resistor", Part Number=R0402_100K_1%_0.0625W_100PPM, Pin Count=2, PressFit=No, Sense=No, SMD=Yes, Socket=No, Status="Not Recommended", TC=±100ppm/°C
R467 R468 R471 R473 R474 R475 R476 R479 R480 R482 R483 R487 R488: library part R0402_10K_1%_0.0625W_100PPM, "Resistor - 1%", Case=0402, Manufacturer=GENERIC, Manufacturer1 ComponentHeight=0.4mm, Manufacturer1 Example="YAGEO PHYCOMP", Manufacturer1 Part Number=232270671003L, Power=0.0625W, Tolerance=±1%, Author="CERN DEM JLC", Component Type=Standard, CreateDate=03.12.2007, HelpURL=\\cern.ch\dfs\Applications\Altium\Datasheets\R0402_Phycomp_RC0402.pdf, LatestRevisionDate=17.10.2012, Manufacturer Part Number=R0402_10K_1%_0.0625W_100PPM, Mounted=Yes, Part Description="General Purpose Thick Film Chip Resistor", Part Number=R0402_10K_1%_0.0625W_100PPM, Pin Count=2, PressFit=No, Sense=No, SMD=Yes, Socket=No, Status="Not Recommended", TC=±100ppm/°C
R469 R477: library part R0402_120R_1%_0.0625W_100PPM, "Resistor - 1%", Case=0402, Manufacturer=GENERIC, Manufacturer1 ComponentHeight=0.4mm, Manufacturer1 Example="YAGEO PHYCOMP", Manufacturer1 Part Number=232270671201L, Power=0.0625W, Tolerance=±1%, Author="CERN DEM JLC", Component Type=Standard, CreateDate=03/12/2007, HelpURL=\\cern.ch\dfs\Applications\Altium\Datasheets\R0402_Phycomp_RC0402.pdf, LatestRevisionDate=17/10/2012, Manufacturer Part Number=R0402_120R_1%_0.0625W_100PPM, Mounted=Yes, Part Description="General Purpose Thick Film Chip Resistor", Part Number=R0402_120R_1%_0.0625W_100PPM, Pin Count=2, PressFit=No, Sense=No, SMD=Yes, Socket=No, Status="Not Recommended", TC=±100ppm/°C
R470 R478: library part R0402_47K_1%_0.0625W_100PPM, "Resistor - 1%", Case=0402, Manufacturer=GENERIC, Manufacturer1 ComponentHeight=0.4mm, Manufacturer1 Example="YAGEO PHYCOMP", Manufacturer1 Part Number=232270675103L, Power=0.0625W, Tolerance=±1%, Author="CERN DEM JLC", Component Type=Standard, CreateDate=03/12/2007, HelpURL=\\cern.ch\dfs\Applications\Altium\Datasheets\R0402_Phycomp_RC0402.pdf, LatestRevisionDate=17/10/2012, Manufacturer Part Number=R0402_47K_1%_0.0625W_100PPM, Mounted=Yes, Part Description="General Purpose Thick Film Chip Resistor", Part Number=R0402_47K_1%_0.0625W_100PPM, Pin Count=2, PressFit=No, Sense=No, SMD=Yes, Socket=No, Status="Not Recommended", TC=±100ppm/°C
R472: library part R0402_1M_1%_0.0625W_100PPM, "Resistor - 1%", Case=0402, Manufacturer=GENERIC, Manufacturer1 ComponentHeight=0.4mm, Manufacturer1 Example="YAGEO PHYCOMP", Manufacturer1 Part Number=232270671005L, Power=0.0625W, Tolerance=±1%, Author="CERN DEM JLC", Component Type=Standard, CreateDate=03/12/2007, HelpURL=\\cern.ch\dfs\Applications\Altium\Datasheets\R0402_Phycomp_RC0402.pdf, LatestRevisionDate=17/10/2012, Manufacturer Part Number=R0402_1M_1%_0.0625W_100PPM, Mounted=Yes, Part Description="General Purpose Thick Film Chip Resistor", Part Number=R0402_1M_1%_0.0625W_100PPM, Pin Count=2, PressFit=No, Sense=No, SMD=Yes, Socket=No, Status="Not Recommended", TC=±100ppm/°C
R481 R486: library part R0603_0R_JUMPER, "Resistor", Case=0603, Manufacturer=GENERIC, Manufacturer1 ComponentHeight=0.55mm, Manufacturer1 Example="NIC COMPONENT", Manufacturer1 Part Number=NRC06Z0, Author="CERN DEM JLC", Component Type=Standard, CreateDate=03/12/2007, HelpURL=\\cern.ch\dfs\Applications\Altium\Datasheets\R0603_NIC_NRC.pdf, LatestRevisionDate=13/03/2008, Manufacturer Part Number=R0603_0R_JUMPER, Mounted=Yes, Part Description="1A (0.05R Max DC Resistance) Zero Ohm Jumper", Part Number=R0603_0R_JUMPER, Pin Count=2, PressFit=No, Sense=No, SMD=Yes, Socket=No, Status=Preferred
R485: library part R0603_NO-VALUE, "Resistor", Case=0603, Author="CERN DEM JLC", Component Type=Standard, CreateDate=03/12/2007, HelpURL=Undefined, LatestRevisionDate=13/03/2008, Manufacturer=Undefined, Manufacturer1 ComponentHeight=Undefined, Manufacturer1 Example=Undefined, Manufacturer1 Part Number=Undefined, Manufacturer Part Number=R0603_NO-VALUE, Mounted=No, Part Description="Reserved Footprint For a 0603 (1608) Chip Resistor", Part Number=R0603_NO-VALUE, Pin Count=2, PressFit=No, Sense=No, SMD=Yes, Socket=No, Status=None
R490: library part R0402_560K_1%_0.0625W_100PPM, "Resistor - 1%", Case=0402, Manufacturer=GENERIC, Manufacturer1 ComponentHeight=0.4mm, Manufacturer1 Example="YAGEO PHYCOMP", Manufacturer1 Part Number=232270675604L, Power=0.0625W, Tolerance=±1%, Author="CERN DEM JLC", Component Type=Standard, CreateDate=03/12/2007, HelpURL=\\cern.ch\dfs\Applications\Altium\Datasheets\R0402_Phycomp_RC0402.pdf, LatestRevisionDate=17/10/2012, Manufacturer Part Number=R0402_560K_1%_0.0625W_100PPM, Mounted=Yes, Part Description="General Purpose Thick Film Chip Resistor", Part Number=R0402_560K_1%_0.0625W_100PPM, Pin Count=2, PressFit=No, Sense=No, SMD=Yes, Socket=No, Status="Not Recommended", TC=±100ppm/°C
T39 T40: "P-CHANNEL MOSFET WITH DIODE", Case=SOT23-3, Manufacturer="ON SEMICONDUCTOR", Author="CERN DEM JLC", Bonding=No, ComponentHeight=1.1mm, Component Type=Standard, CreateDate=29.03.2012, Device=BSS84LT1G, HelpURL=\\cern.ch\dfs\Applications\Altium\Datasheets\BSS84LT1G.pdf, LatestRevisionDate=29.03.2012, Manufacturer Part Number=BSS84LT1G, Mounted=Yes, PackageDescription="SOT23 3-Leads, Pitch 0.95mm - Body 1.4x3mm, IPC Medium Density", Part Description="50V 130mA Single P-Channel Power MOSFET", Part Number=BSS84LT1G, Pin Count=3, PressFit=No, Sense=No, SMD=Yes, Socket=No
TP53 TP54 TP55 TP56: library part SMD_PAD_1.27X1.27MM, Author="CERN DEM JLC", ComponentHeight=0mm, Component Type="Standard (No BOM)", CreateDate=12.01.2008, Family="Test Point", HelpURL=Undefined, LatestRevisionDate=12.01.2008, Mounted=No, PackageDescription="1.27mm x 1.27mm PCB Copper Area (SMD Test Point)", Part Description="1.27mm x 1.27mm PCB Copper Area (SMD Test Point)", Part Number=SMD_PAD_1.27X1.27MM, Pin Count=1, Sense=No, SMD=Yes, Socket=No, Status=None
X2: library part X_CRYSTAL_HC49_SMT_27M, "Crystal oscillator", Supplier Part Number 1=56P2844, Supplier 1=Newark
X3: library part X_CRYSTAL_32k_FC-135, "32kHz SMT crystal (EPSON)"

## Via types
v1: diameter 19.68, hole 7.87, Top to Bot, tented both sides, 133 vias
v2: diameter 39.37, hole 27.56, Top to Bot, tented both sides, 19 vias

## Nets (pads, with @x,y where several pads share a name; then routed paths per layer and width w, separated by ;. In a path a pad name is that pad's centre, name@x,y a point inside that pad or via, vN(x,y) a via of type N, cw(c..) or ccw(c..) an arc to the next point about the centre after c; other vN are vias at no path point)
ANT: C332.2 L17.1 | length 4242.2
  Top w39.37: v2(70.87,4251.97) 110.24,4212.6 110.24,4094.49 v2(149.61,4055.12) ; v2(149.61,4251.97) 188.98,4212.6 188.98,4094.49 v2(228.35,4055.12) ; v2(228.35,4251.97) 267.72,4212.6 267.72,4094.49 v2(307.09,4055.12) ; v2(307.09,4251.97) 346.46,4212.6 346.46,4094.49 v2(385.83,4055.12) ; v2(385.83,4251.97) 425.2,4212.6 425.2,4094.49 v2(464.57,4055.12) ; v2(464.57,4251.97) 503.94,4212.6 503.94,4094.49 v2(543.31,4055.12) ; v2(543.31,4251.97) 582.68,4212.6 582.68,4094.49 v2(622.05,4055.12) ; v2(622.05,4251.97) 661.42,4212.6 661.42,4094.49 v2(700.79,4055.12) ; v2(700.79,4251.97) 740.16,4212.6 740.16,4094.49 v2(779.53,4055.12)
  Bot w39.37: C332.2@70.87,3846.65 v2(70.87,4251.97) ; v2(149.61,4055.12) v2(149.61,4251.97) ; v2(228.35,4055.12) v2(228.35,4251.97) ; v2(307.09,4055.12) v2(307.09,4251.97) ; v2(385.83,4055.12) v2(385.83,4251.97) ; v2(464.57,4055.12) v2(464.57,4251.97) ; v2(543.31,4055.12) v2(543.31,4251.97) ; v2(622.05,4055.12) v2(622.05,4251.97) ; v2(700.79,4055.12) v2(700.79,4251.97) ; v2(779.53,4055.12) v2(779.53,4251.97)
GND: BATH7.2 C319.1 C320.2 C321.1 C322.1 C323.1 C324.1 C325.1 C326.1 C327.1 C328.1 C329.1 C330.1 C331.1 C333.1 IC109.1 IC109.2 IC109.3 IC109.4 IC109.7 IC110.7 IC111.2 IC112.5 IC112.21 IC112.33 IC113.1 IC113.8 IC113.10 IC114.4 J114.6 J115.2 L17.2 LD27.1 LD35.1 R471.1 R478.1 R479.1 R484.1 R491.1 TP54.1 | length 6152.5
  Top w8: v1(-187.01,3208.69) -135.72,3208.69 v1(-132.87,3211.54) ; v1(-161.42,3740.16) LD35.1 ; v1(-132.87,3629.92) LD27.1 ; -98.43,3740.16 LD35.1 ; v1(4.89,2883.67) 9.37,2879.2 6.16,2875.98 -24.86,2875.98 R478.1 -33.51,2866.93 -14.08,2847.5 -14.08,2846.43 -12.71,2845.07 -12.71,2837.31 -6.75,2831.34 -6.75,2827.63 5.21,2815.67 5.21,2789.08 IC111.2 5.91,2765.75 15.75,2755.91 v1(39.37,2755.91) ; v1@34.44,2588.59 39.52,2583.51 50.2,2594.19 C320.2 52.17,2624.02 71.4,2643.25 71.4,2675.91 70.87,2676.45 v1(70.87,2698.82) ; v1(73.82,2805.14) 76.79,2805.14 78.74,2807.09 C323.1@78.74,2831.69 ; v1(146.65,2707.18) 192.42,2707.18 201.64,2697.96 201.64,2694.96 215.7,2680.91 R471.1 ; v1(150.93,3658.46) BATH7.2@381.89,3427.51 ; v1(150.93,3705.71) 150.93,3710.88 62.6,3799.21 v1(11.81,3799.21) v1(-57.09,3799.21) -69.89,3799.21 LD35.1 ; v1(152.56,2800.2) 157.48,2805.12 C331.1@157.48,2825.79 ; C330.1 179.63,2573.84 v1(216.54,2573.84) ; v1(265.75,2583.68) 244.43,2583.68 224.41,2603.7 224.41,2657.28 R471.1 ; C321.1 285.75,2684.37 v1(285.75,2706.4) 268.72,2723.43 265.75,2723.43 ; v1(314.96,3700.79) 314.96,3673.23 381.89,3606.3 BATH7.2@381.89,3427.51 ; v1(403.55,2775.61) 407.55,2771.61 407.55,2770.67 383.32,2770.67 372.11,2759.46 274.21,2759.46 v1(265.75,2751.01) 265.75,2723.43 ; C324.1@506.89,2615.16 506.89,2588.58 v1(516.73,2578.74) ; C328.1 559.06,2590.55 v1(565.94,2583.66) ; v1(590.55,3041.34) 381.89,3250 BATH7.2 BATH7.2@381.89,3427.51 ; v1(703.15,2911.81) 760.24,2911.81 C326.1 762.8,2914.37 v1(762.8,2947.83) ; v1(930.12,3447.33) v1(990.55,3447.33) ; R471.1 v1(248.03,2705.71) 265.75,2723.43
  Bot w8: C333.1 -178.35,3457.68 R491.1 -164.96,3458.86 -156.5,3450.39 ; v1(-187.01,3208.69) -187.01,3211.61 -156.5,3242.13 IC109.1 -156.5,3450.39 ; v1(-161.42,3740.16) -161.42,3709.65 -133.85,3682.09 -118.11,3682.09 -132.87,3667.32 v1(-132.87,3629.92) -121.85,3618.9 R484.1 ; v1(-132.87,3211.54) v1(-132.87,3211.54) -130.91,3213.58 IC109.7 v1(-130.91,3129.92) -130.91,3075.49 -106.6,3051.18 47.24,3051.18 70.87,3027.55 IC113.8 70.87,2922.01 55.55,2906.7 33.46,2906.7 10.43,2883.67 v1(4.89,2883.67) ; IC109.2 -132.68,3403.35 R484.1@-132.68,3453.74 ; J115.2@-118.11,3798.23 -67.91,3798.23 -66.93,3799.21 v1(-57.09,3799.21) v1(11.81,3799.21) v1(11.81,3838.58) L17.2 v1(-22.78,3877.95) ; IC109.3 -105.31,3448.03 ; IC109.4 -79.72,3432.09 -91,3443.36 -99.99,3443.36 -104.66,3448.03 -105.31,3448.03 ; C325.1 -22.63,2652.71 11.81,2618.26 11.81,2601.4 v1(29.53,2583.68) ; IC112.21 90.55,2761.81 IC112.33 IC112.33@110.24,2742.13 ; IC113.10 149.61,3657.14 v1(150.93,3658.46) ; IC112.5@195.56,2743.42 IC112.5 244.83,2742.13 244.95,2742.25 C322.1@243.11,2744.09 ; C322.1 C322.1@243.11,2744.09 ; v1(265.75,2751.01) 265.75,2749.86 259.99,2744.09 C322.1@243.11,2744.09 ; v1(285.75,2706.4) 290.15,2710.79 307.32,2710.79 317.25,2720.72 317.25,2753.27 317.91,2753.94 C327.1 ; v1(314.96,3700.79) C329.1 ; 356.3,2629.92 355.71,2629.33 355.71,2593.58 359.25,2597.13 359.25,2629.92 IC110.7 ; v1(403.55,2775.61) 409.02,2770.14 468.59,2770.14 485.76,2752.97 ; v1(590.55,3041.34) 590.55,3026.57 622.05,2995.08 IC113.1 622.05,2925.2 635.43,2911.81 v1(703.15,2911.81) ; v1(762.8,2947.83) v1@765.75,2944.88 ; C319.1 v1@765.75,2944.88 ; IC114.4 911.42,3421.26 930.12,3439.96 v1(930.12,3447.33) 957.68,3474.89 TP54.1 ; v1(990.55,3447.33) 976.77,3433.55 976.77,3173.23 765.75,2962.2 v1@765.75,2944.88 ; -156.5,3450.39 -136.02,3450.39 R484.1@-132.68,3453.74 ; R484.1@-132.68,3453.74 R484.1 ; R484.1 -105.31,3448.03
  other v1: 305.12,2544.29 367.07,2580.63 513.42,2744.52 634.84,2744.52 721.85,2849.41 663.39,2900.85 108.27,2966.54 38.35,2972.44 839.47,3043.31 925.2,3127.69 -186.16,3167.22 688.98,3508.86 14.76,3517.26 -41.89,3518.7 -132.87,3525.59 779.53,3609.21 24.61,3695.87 -241.14,3701.77 821.85,3740.16 992,3740.16 472.44,3793.23 572.99,3793.23 785.61,3793.23 935.04,3793.23 113.19,3794.29 194.51,3794.29 279.9,3794.29 374.05,3794.29 672.48,3794.29
"MCU_A0_VBAT MOSFET": IC112.23 R489.1 T40.1 | length 1369.2
  Top w5: v1(-40.3,3022.6) -59.29,3041.6 -111.16,3041.6 -243.88,3174.32 -243.88,3471.78 -228.72,3486.94 -228.72,3501.31 -255.93,3528.51 -255.93,3657.47 -230.56,3682.83 -57.84,3682.83 v1(-26.57,3651.57)
  Bot w5: T40.1 -83.46,3619.88 R489.1 -19.68,3644.68 v1(-26.57,3651.57) ; v1(-40.3,3022.6) -40.3,2986.89 -20.3,2966.89 -20.3,2806.71 -14.76,2801.18 IC112.23
"MCU_A1-RTC VCC": IC112.24
"MCU_A4_I2C SDA": IC112.27
"MCU_A5_I2C SCL": IC112.28
"MCU_A6_VBAT VOLT": C333.2 IC112.19 R490.2 R491.2 | length 1036.4
  Top w5: v1(-246.06,3494.12) -253.88,3486.31 -253.88,3170.18 -107.96,3024.26 v1(-73.82,3024.26)
  Bot w5: v1(-246.06,3494.12) C333.2@-216.54,3494.12 ; C333.2 C333.2@-216.54,3494.09 ; R490.2 C333.2@-216.54,3494.12 ; R491.2 -178.91,3494.12 C333.2@-216.54,3494.12 ; v1(-73.82,3024.26) -73.82,3006.27 -36.26,2968.71 -36.26,2739.92 -18.78,2722.44 IC112.19
"MCU_A7_VIN VOLT": IC112.22
MCU_AREF: IC112.20
"MCU_D2_INT0 RFM69": IC112.32 IC113.14 | length 1321.9
  Top w5: v1(117.13,3542.32) 77.75,3542.32 31.23,3495.8 31.23,3273.67 21.87,3264.3 21.87,3170.03 90.3,3101.6 99.61,3101.6 143.44,3057.77 159.23,3057.77 231.61,2985.38 231.61,2906.18 239.25,2898.54 v1(239.25,2888.78)
  Bot w5: v1(117.13,3542.32) 119.88,3545.08 459.45,3545.08 464.57,3550.2 IC113.14 ; IC112.32 169.29,2868.11 179.86,2878.68 188.49,2878.68 198.59,2888.78 v1(239.25,2888.78)
MCU_D3_INT1-RTC_INT: IC112.1
MCU_D4_BTN1: IC112.2
MCU_D5_BTN2: IC112.9
MCU_D6_LED1: IC112.10 R482.1 | length 1371.9
  Top w5: R482.1 -182.09,3536.22 -139.99,3494.12 -17.29,3494.12 v1(12.2,3464.63) ; v1(49.07,3464.63) 47.24,3462.79 47.24,3275.53 31.87,3260.16 31.87,3186.63 145.67,3072.83 158.3,3072.83 241.61,2989.53 241.61,2910.95 256.6,2895.96 256.6,2870.61 257.86,2869.35 v1(263.78,2869.35)
  Bot w5: v1(12.2,3464.63) v1(49.07,3464.63) ; IC112.10 149.61,2634.3 160.86,2623.05 161.74,2623.94 v1(175.16,2623.94) 175.16,2626.06 237.47,2688.37 255.21,2688.37 265.37,2698.53 265.37,2716 272.04,2722.66 277.49,2722.66 294.09,2739.27 294.09,2765.2 273.6,2785.69 273.6,2860.47 v1@263.78,2870.29
"MCU_D7-RFM69 RST": IC112.11 IC113.6 R484.2 | length 1425.1
  Top w5: v1(-54.13,3464.57) -24.61,3464.57 20.45,3419.51 20.45,3316.43 13.94,3309.91 13.94,3270.51 11.87,3268.45 11.87,3165.18 85.45,3091.6 95.47,3091.6 139.8,3047.27 154.82,3047.27 158.17,3043.92 158.94,3043.92 193.94,3008.92 v1(187.01,3001.99) ; v1(305.12,2895.06) 352.97,2895.06 420.89,2827.14 420.89,2767.75 406.26,2753.12 387.86,2753.12 380.8,2746.06 343.27,2746.06 310.04,2712.83 v1(310.04,2691.95)
  Bot w5: R484.2 v1(-54.13,3464.57) ; IC112.11 129.92,2639.85 164.06,2605.71 181.46,2605.71 192.5,2616.75 192.5,2627.97 237.6,2673.07 274.81,2673.07 280.67,2678.93 280.67,2680.36 289.37,2689.06 307.15,2689.06 v1(310.04,2691.95) ; v1(187.01,3001.99) 196.85,3001.99 226.4,2972.44 IC113.6 252.3,2948.49 268.61,2948.49 279.9,2937.2 279.9,2929.97 284.29,2925.57 290.35,2925.57 301.41,2914.52 301.41,2898.77 v1(305.12,2895.06)
"MCU_D8_FLASH SS": IC112.12 IC114.1 R487.1 | length 1516.6
  Top w5: v1(334.65,2709.29) 337.39,2706.55 363.48,2706.55 383,2726.06 389.09,2726.06 396.14,2733.12 414.55,2733.12 440.89,2759.46 440.89,2835.43 428.15,2848.17 428.15,2918.31 443.31,2933.46 552.66,2933.46 560.01,2926.12 593.44,2926.12 757.66,3090.33 757.66,3275.71 760.77,3278.82 760.77,3351.52 748.41,3363.88 748.41,3378.25 752.95,3382.79 752.95,3454.24 v1(753.44,3454.72)
  Bot w5: IC112.12 110.24,2645.39 159.91,2595.71 185.6,2595.71 202.5,2612.61 202.5,2623.82 241.74,2663.07 310.71,2663.07 334.65,2687.01 v1(334.65,2709.29) ; R487.1 728.74,3490.75 IC114.1@728.74,3430.03 ; IC114.1 IC114.1@728.74,3430.03 ; v1(753.44,3454.72) IC114.1@728.74,3430.03
MCU_D9_LED2: IC112.13 R480.1 | length 1309.6
  Top w5: R480.1 -218.72,3546.87 -218.72,3482.8 -233.88,3467.64 -233.88,3178.46 -107.02,3051.6 78.9,3051.6 99.58,3030.92 99.58,3022.23 159.82,2961.99 159.82,2898.84 165.34,2893.33 165.34,2888.24 166.95,2886.63 166.95,2872.53 150.93,2856.52 125.44,2856.52 106.98,2838.06 106.98,2797.55 100.39,2790.96 100.39,2719.37 88.21,2707.18 88.21,2632.52 v1(83.66,2627.97) v1@88.56,2627.97
  Bot w5: v1(83.66,2627.97) 84.27,2628.58 84.27,2649.23 IC112.13
"MCU_D10_RFM69 SS": IC112.14 IC113.5 R483.2 | length 1294.2
  Top w5: v1(14.76,3100.39) 49.12,3100.39 67.91,3081.6 91.32,3081.6 129.58,3043.34 129.58,3034.66 134.31,3029.93 v1(147.64,3029.93) ; v1(319.88,2918.33) 354.33,2918.33 408.46,2864.2 408.46,2853.71 430.89,2831.28 430.89,2763.61 410.41,2743.12 392,2743.12 384.94,2736.06 368.47,2736.06 v1(356.3,2723.89)
  Bot w5: v1(14.76,3100.39) 16.93,3102.56 R483.2 ; IC112.14 73.35,2653.02 74.27,2653.02 74.27,2643.11 66.32,2635.16 66.32,2620.79 76.48,2610.63 130.85,2610.63 155.77,2585.71 189.74,2585.71 212.5,2608.47 212.5,2619.68 245.89,2653.07 314.85,2653.07 356.3,2694.52 v1(356.3,2723.89) ; v1(147.64,3029.93) 297.36,3029.93 307.09,3020.2 IC113.5 307.09,2931.93 319.88,2919.13 v1(319.88,2918.33)
MCU_D11_SPI_MOSI: IC112.15 IC113.3 IC114.5 J114.4 | length 2017.9
  Top w5: v1(378.94,2696.87) 378.94,2695.79 406.2,2723.05 418.62,2723.05 472.44,2776.88 v1@472.44,2894.38 ; v1(472.44,2898.65) 497.26,2923.46 548.52,2923.46 555.86,2916.12 605.1,2916.12 767.72,3078.74 767.72,3127.21 800.54,3160.04 v1(782.48,3160.04) ; J114.4 907.68,3647.24 910.61,3644.31 914.86,3644.31 917.41,3641.76 v1(984.26,3641.76)
  Bot w5: IC112.15 57.46,2655.51 57.46,2640.44 56.32,2639.3 56.32,2616.65 72.34,2600.63 126.71,2600.63 151.63,2575.71 193.88,2575.71 222.5,2604.33 222.5,2615.54 250.03,2643.07 319.12,2643.07 372.92,2696.87 v1(378.94,2696.87) ; IC113.3 472.44,2964.56 v1(472.44,2898.65) ; v1(782.48,3160.04) 802.75,3139.76 820.35,3139.76 821.56,3138.55 835.92,3138.55 878.74,3181.37 IC114.5 878.74,3360.05 990.18,3471.49 990.18,3635.84 v1(984.26,3641.76)
MCU_D12_SPI_MISO: IC112.16 IC113.2 IC114.2 | length 1571.6
  Top w5: v1(413.39,2705.71) 415.42,2705.71 482.44,2772.74 482.44,2879.04 509.55,2906.15 523.92,2906.15 v1(541.34,2906.12) 611.83,2906.12 779.53,3073.82 779.53,3122.05 797.24,3139.76 797.24,3142.6 810.54,3155.89 810.54,3164.18 804.68,3170.04 801.42,3170.04 772.64,3198.82 772.64,3371.06 v1(765.75,3371.06)
  Bot w5: IC112.16 31.5,2633.02 46.32,2618.2 46.32,2612.51 68.19,2590.63 122.57,2590.63 156.7,2556.5 228.64,2556.5 235.33,2563.18 235.33,2614.23 254.17,2633.07 323.26,2633.07 368.12,2677.93 389.45,2677.93 413.39,2701.87 v1(413.39,2705.71) ; v1(541.34,2906.12) 541.34,2970.48 IC113.2 ; v1(765.75,3371.06) 778.74,3384.06 IC114.2
MCU_D13_SPI_SCK: IC112.17 IC113.4 IC114.6 J114.3 | length 1920.9
  Top w5: v1(456.68,2722.44) 501.75,2767.52 501.75,2873.82 v1(516.74,2888.8) ; v1(516.74,2888.8) 621.06,2888.78 800.54,3068.26 800.54,3127.69 v1(828.74,3155.89) ; v1(905.51,3482.68) 905.51,3545.08 J114.3
  Bot w5: IC112.17 6.58,2680.43 6.58,2639.76 23.31,2623.02 23.31,2621.37 64.05,2580.63 118.42,2580.63 152.56,2546.5 232.78,2546.5 248.8,2562.51 248.8,2571.18 248.41,2571.58 248.41,2613.16 258.31,2623.07 329,2623.07 373.86,2667.93 393.59,2667.93 399.87,2674.21 408.45,2674.21 v1(456.68,2722.44) ; IC113.4 385.83,2924.21 429.51,2880.53 508.46,2880.53 v1(516.74,2888.8) ; v1(828.74,3155.89) IC114.6 856.3,3234.25 856.3,3450.98 887.99,3482.68 v1(905.51,3482.68)
NetBATH7_1a: BATH7.1a BATH7.1b R481.2 | length 1499.6
  Top w5: BATH7.1a 957.68,3254.92 R481.2
  Top w8: BATH7.1b -7.87,3326.77 v1(-6.89,3327.76) ; v1(49.21,3252.98) 57.93,3244.26 57.93,3190.3 248.23,3000 575.86,3000 616.97,3041.11 616.97,3096.79 711.47,3191.29 711.47,3270.6 718.82,3277.94 718.82,3289.68 v1(723.43,3294.29)
  Bot w8: v1(-6.89,3327.76) 49.21,3271.65 v1(49.21,3252.98) ; v1(723.43,3294.29) v1(803.74,3294.29)
NetC321_2: C321.2 D139.1 R471.2 R475.1 | length 532.8
  Top w5: R475.1 11.81,2568.89 24.21,2556.5 263.09,2556.5 283.09,2576.5 283.09,2590.87 272.93,2601.03 254.61,2601.03 238.19,2617.44 238.19,2643.9 R471.2
  Top w7.87: R471.2 282.32,2643.9 300.83,2662.4 D139.1 D139.1@326.62,2662.4
NetC324_2: C324.2 D139.3 R477.2 | length 84.3
  Top w7.87: D139.3 392.72,2615.16 C324.2@471.46,2615.16
NetC325_2: C325.2 D139.2 R473.2 R479.2 | length 472
  Top w5: R473.2@-23.46,2625.39 v1(-23.46,2588.37) 18.41,2546.5 271.89,2546.5 301.75,2576.35 317.91,2592.52 317.91,2609.25 D139.2
  Bot w5: C325.2 -24.61,2589.51 v1(-23.46,2588.37)
NetC326_2: C326.2 IC110.1 R472.2 X2.1 | length 442.3
  Top w7.87: v1(688.98,2696.87) 684.03,2696.87 661.34,2719.57 661.34,2731.71 669.29,2739.66 669.29,2746.06 ; R472.2 671.06,2747.83 669.29,2746.06 ; C326.2 765.75,2844.49 765.75,2793.31 X2.1 653.54,2761.81 669.29,2746.06
  Bot w7.87: IC110.1 v1@688.78,2696.87
NetC327_2: C327.2 IC110.2 IC110.3 IC110.5 L16.2 R472.1 X2.2 | length 852.6
  Top w7.87: X2.2 283.54,2817.99 295.28,2829.72 v1(295.28,2840.95) ; v1(695.28,2722.44) 717.52,2722.44 729.13,2710.83 R472.1 763.39,2700.39 L16.2
  Bot w7.87: v1(295.28,2840.95) 305.13,2840.95 390.41,2755.67 450.01,2755.67 475.46,2730.22 475.46,2723.36 504.43,2694.39 488.78,2678.74 IC110.5 ; v1@506.01,2695.97 529.44,2695.97 533.47,2691.93 578.94,2691.93 588.78,2682.09 ; IC110.3 588.78,2682.09 ; IC110.2 638.78,2668.31 625,2682.09 ; v1(695.28,2722.44) 675.2,2722.44 634.84,2682.09 625,2682.09 ; 588.78,2682.09 625,2682.09
  other v1: 501.97,2696.85
NetC328_2: C328.2 L16.1 | length 67.2
  Top w7.87: C328.2 639.17,2644.09 L16.1
NetC330_2: C330.2 IC112.8 X3.1 | length 176.2
  Top w5: X3.1@146.65,2665.81 146.65,2680.12 164.37,2662.4 170.74,2668.77 v1(190.48,2668.77)
  Top w6: C330.2 122.33,2657.76 130.37,2665.81 146.65,2665.81 X3.1
  Bot w5: v1(190.48,2668.77) 190.48,2676.7 IC112.8
NetC331_2: C331.2 IC112.7 X3.2 | length 215.2
  Top w5: C331.2@122.05,2825.79 122.05,2801.18 X3.2@146.65,2776.57
  Top w8: X3.2@146.65,2776.57 146.65,2737.25 163.6,2720.3 202.95,2720.3 v1(220.48,2702.77)
  Bot w8: IC112.7 v1(220.48,2702.77) ; v1(220.48,2702.77) 222.44,2702.76 221.48,2701.79 v1(220.48,2702.77)
NetC332_1: C332.1 R485.2 R486.2 | length 61
  Bot w30: R485.2 C332.1
NetIC110_4: IC110.4 R469.1 | length 85.5
  Top w7.87: R469.1@505.91,2652.56 505.91,2661.43 v1(521.66,2677.19)
  Bot w7.87: v1(521.66,2677.19) 521.66,2667.32 538.78,2650.2 IC110.4
NetIC110_6: IC110.6 R477.1 | length 76.4
  Top w7.87: R477.1 433.07,2672.24 v1(437.99,2677.17)
  Bot w7.87: v1(437.99,2677.17) 438.78,2676.38 IC110.6
NetIC111_1: IC111.1 R470.1 R474.2 | length 190.7
  Top w5: IC111.1 31.5,2811.46 31.32,2811.64 21.65,2811.64 16.71,2816.58 16.71,2824.15 13.69,2827.17 4.75,2836.11 2.94,2837.92 2.94,2852.29 15.92,2865.27 16.55,2865.27 21.58,2870.3 25.49,2870.3 26.71,2869.07 26.71,2875.22 36.4,2875.22 R474.2@42.52,2869.09
  Top w8: IC111.1 60.83,2788.39 76.77,2772.44 R470.1@76.77,2773.62
NetIC111_3: IC111.3 R473.1 R478.2 | length 197.9
  Top w7.87: R478.2@-25.59,2831.89 -19.69,2825.98 IC111.3 -19.69,2754.76 -35.28,2739.17 -35.28,2690.33 -42.72,2682.89 -42.72,2671.61 R473.1
NetIC111_4: IC111.4 R470.2 R475.2 | length 165.8
  Top w8: IC111.4 11.81,2705.71 ; R475.2 16.59,2666 16.59,2700.93 11.81,2705.71 ; R470.2@76.77,2735.43 26.84,2735.43 11.81,2720.41 11.81,2705.71
NetIC112_30: IC112.30 TP56.1 | length 210.4
  Top w5: TP56.1 97.71,2933.07 116.27,2914.51 116.27,2896.53 123.31,2889.48 v1(123.31,2882.12)
  Bot w5: v1(123.31,2882.12) 123.31,2889.48 129.92,2882.87 IC112.30
NetIC112_31: IC112.31 TP55.1 | length 281.5
  Top w5: TP55.1 95.86,3011.81 148,2959.67 v1(148,2883.86)
  Bot w5: v1(148,2883.86) 148,2850.04 IC112.31
NetIC113_9: IC113.9 R485.1 | length 74.8
  Bot w30: IC113.9 R485.1
NetIC114_3: IC114.3 IC114.7 R488.2 | length 343.6
  Bot w5: R488.2 765.14,3153.02 765.14,3167.22 775.3,3177.38 778.74,3177.38 IC114.7 778.74,3275.79 785.74,3282.79 790.71,3282.79 796.56,3276.95 810.92,3276.95 828.74,3294.77 IC114.3
NetJ115_1: J115.1 R486.1 | length 65.9
  Bot w30: J115.1 R486.1
NetLD27_2: LD27.2 R480.2 | length 74.1
  Top w8: R480.2 -236.22,3621.2 LD27.2
NetLD35_2: LD35.2 R482.2 | length 143.7
  Top w6: v1(-193.9,3701.77) LD35.2 ; v1(-187.99,3627.95) -182.09,3622.05 R482.2
  Bot w6: v1(-193.9,3701.77) -193.9,3633.86 v1(-187.99,3627.95)
NetR490_1: R490.1 T40.3 | length 42.8
  Bot w6: R490.1 -215.35,3582.68 T40.3
P3V0: C322.2 C329.2 IC109.8 IC112.4 IC112.18 IC113.13 IC114.8 J114.2 R466.2 R467.1 R468.1 R476.1 R481.1 R483.1 R487.2 R488.1 R489.2 T39.2 T40.2 TP53.1 | length 3996.9
  Top w5: v1(-26.57,3442.01) -25.89,3442.01 10.45,3405.67 10.45,3320.57 -6.89,3303.23 -6.89,3264.24 v1(-5.47,3262.82) ; v1(7.87,3582.68) 12.8,3582.68 118.48,3688.37 278.01,3688.37 307.78,3718.13 322.14,3718.13 328.66,3711.61 345.47,3711.61 v1(385.83,3671.26) ; v1(730.32,3262.8) 734.93,3267.41 734.93,3281.27 740.77,3287.11 740.77,3341.52 707.09,3375.2 707.09,3485.82 724.22,3502.95 v1(776.57,3502.95) 776.57,3567.72 v1(841.54,3632.68) 857.68,3648.82 J114.2
  Top w15: v1(856.31,3129.95) 856.31,3131.98 853.45,3134.84 878.64,3160.04 878.64,3162.11 885.83,3169.29 R481.1